# EAGLE board Adapter-QFN-24 (EAGLE 5.06)
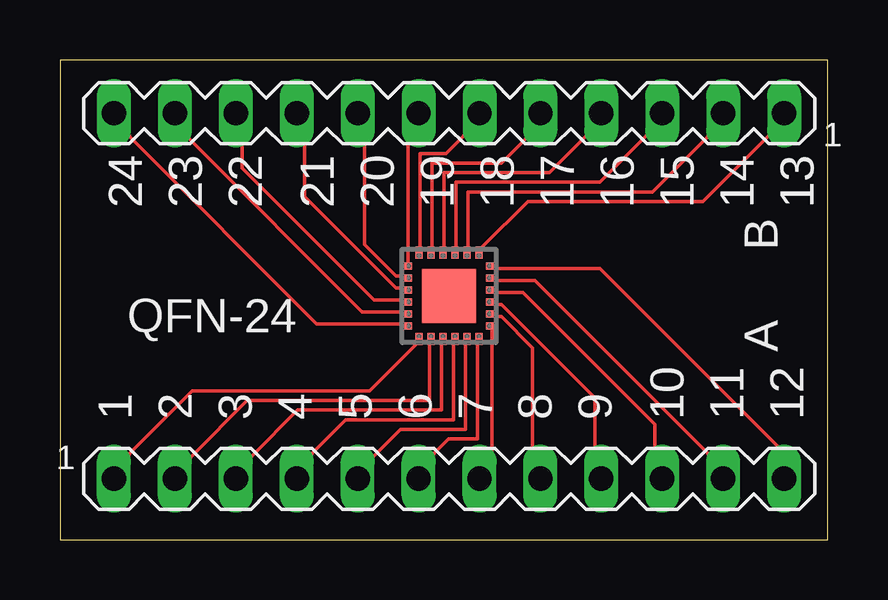
[diagram p0: board, top side]

Size 32 x 20 mm. Coordinates in mm from the lower left corner, seen from the top.
Outline: 32,0 32,20 0,20 0,0 32,0
Copper layers (1*16): Top 0.035mm / dielectric 1.5mm / Bottom 0.035mm
Design rules "PCB-POOL": minimum track width 6mil, minimum drill 12mil, track to track 6mil, track to pad 6mil, pad to pad 6mil, via to via 6mil, smd to smd 6mil, copper to edge 20mil, drill to drill 8mil, minimum pad ring 8mil, minimum via ring 6mil, stop-mask expansion 3mil, vias tented up to drill 0mil, thermal gap 8mil
Net classes: 0 default: width 0.1 mm

## Footprints (pad centres in the part's own frame; a part is rotated, then mirrored left to right if it is on the bottom)
MA12-1 = drill 1.016 long: 1 -13.97,0; 2 -11.43,0; 3 -8.89,0; 4 -6.35,0; 5 -3.81,0; 6 -1.27,0; 7 1.27,0; 8 3.81,0; 9 6.35,0; 10 8.89,0; 11 11.43,0; 12 13.97,0
HVQFN24 = smd 0.5 x 0.3: 1 -1.8,1.25; 2 -1.8,0.75; 3 -1.8,0.25; 4 -1.8,-0.25; 5 -1.8,-0.75; 6 -1.8,-1.25; 13 1.8,-1.25; 14 1.8,-0.75; 15 1.8,-0.25; 16 1.8,0.25; 17 1.8,0.75; 18 1.8,1.25 | smd 0.3 x 0.5: 7 -1.25,-1.8; 8 -0.75,-1.8; 9 -0.25,-1.8; 10 0.25,-1.8; 11 0.75,-1.8; 12 1.25,-1.8; 19 1.25,1.8; 20 0.75,1.8; 21 0.25,1.8; 22 -0.25,1.8; 23 -0.75,1.8; 24 -1.25,1.8 | smd 2.25 x 2.25: TH 0,0

## Placement (x,y rotation side)
A  [MA12-1]  16.22,2.54 0 top
B  [MA12-1]  16.22,17.78 180 top
QFN-24  GENERIC_QFN24  [HVQFN24]  16.22,10.16 90 top

## Library data of the parts
A B QFN-24 = turbod3

## Nets
N$1: A.1 QFN-24.1
N$2: A.2 QFN-24.2
N$3: A.3 QFN-24.3
N$4: A.4 QFN-24.4
N$5: A.5 QFN-24.5
N$6: A.6 QFN-24.6
N$7: A.7 QFN-24.7
N$8: A.8 QFN-24.8
N$9: A.9 QFN-24.9
N$10: A.10 QFN-24.10
N$11: A.11 QFN-24.11
N$12: A.12 QFN-24.12
N$13: B.1 QFN-24.13
N$14: B.2 QFN-24.14
N$15: B.3 QFN-24.15
N$16: B.4 QFN-24.16
N$17: B.5 QFN-24.17
N$18: B.6 QFN-24.18
N$19: B.7 QFN-24.19
N$20: B.8 QFN-24.20
N$21: B.9 QFN-24.21
N$22: B.12 QFN-24.24
N$23: B.10 QFN-24.22
N$24: B.11 QFN-24.23

## Tracks (layer width: path | path; a pad name or v marks a point on that pad's centre or on a via)
N$1
  Top 0.152: QFN-24.1 14.9,8.2 12.9,6.2 5.5,6.2 2.9,3.6 A.1
N$2
  Top 0.152: QFN-24.2 15.4,8.2 15.4,5.8 7.8,5.8 5.5,3.5 A.2
N$3
  Top 0.152: QFN-24.3 15.9,8.2 15.9,5.4 9.9,5.4 8,3.5 A.3
N$4
  Top 0.152: QFN-24.4 16.4,8.2 16.4,5 11.9,5 10.5,3.6 A.4
N$5
  Top 0.152: QFN-24.5 16.9,8.2 16.9,4.6 14.2,4.6 13.1,3.5 A.5
N$6
  Top 0.152: QFN-24.6 17.4,8.2 17.4,4.2 16.2,4.2 15.6,3.6 A.6
N$7
  Top 0.152: QFN-24.7 18,8.8 18,3.7 A.7
N$8
  Top 0.152: QFN-24.8 18.2,9.3 18.4,9.3 19.7,8 19.7,3.9 A.8
N$9
  Top 0.152: QFN-24.9 18.2,9.8 18.4,9.8 22.3,5.9 22.3,3.9 A.9
N$10
  Top 0.152: QFN-24.10 18.2,10.3 19.3,10.3 24.8,4.8 24.8,3.9 A.10
N$11
  Top 0.152: QFN-24.11 18.2,10.8 19.8,10.8 27,3.6 A.11
N$12
  Top 0.152: QFN-24.12 18.2,11.3 22.5,11.3 29.9,3.9 A.12
N$13
  Top 0.152: QFN-24.13 17.6,12.2 19.5,14.1 26.8,14.1 29.5,16.8 B.1
N$14
  Top 0.152: QFN-24.14 17,12.2 17,14.5 24.7,14.5 27,16.8 B.2
N$15
  Top 0.152: QFN-24.15 16.5,12.2 16.5,14.9 22.5,14.9 24.4,16.8 B.3
N$16
  Top 0.152: QFN-24.16 16,12.2 16,15.3 20.4,15.3 21.9,16.8 B.4
N$17
  Top 0.152: QFN-24.17 15.5,12.2 15.5,15.7 18.4,15.7 19.4,16.7 B.5
N$18
  Top 0.152: QFN-24.18 15,12.2 15,16.1 16.1,16.1 16.8,16.8 B.6
N$19
  Top 0.152: QFN-24.19 14.5,11.5 14.5,16.6 B.7
N$20
  Top 0.152: QFN-24.20 14.2,11 14,11 12.7,12.3 12.7,16.4 B.8
N$21
  Top 0.152: QFN-24.21 14.2,10.5 14,10.5 10.2,14.3 10.2,16.4 B.9
N$22
  Top 0.152: QFN-24.24 14.2,9 10.7,9 2.9,16.8 B.12
N$23
  Top 0.152: QFN-24.22 14.2,10 13.1,10 7.6,15.5 7.6,16.4 B.10
N$24
  Top 0.152: QFN-24.23 14.2,9.5 12.6,9.5 5.4,16.7 B.11

## Text on the board
tNames: 24 | 23 | 22 | 21 | 20 | 19 | 18 | 17 | 16 | 15 | 14 | 13 | 1 | 2 | 3 | 4 | 5 | 6 | 7 | 8 | 9 | 10 | 11 | 12